# Altium PCB LogicsOnly.PcbDoc (part 1 of 3)
Units mm, origin at the board's own origin, x right, y up, seen from the top; angles counter-clockwise.
Board outline 98.85 x 158 mm, 2 copper layers (Top Layer, Bottom Layer); 236 components, 165 nets, 784 pads, 89 vias.
Unrouted connection lines stored in the file: 82.
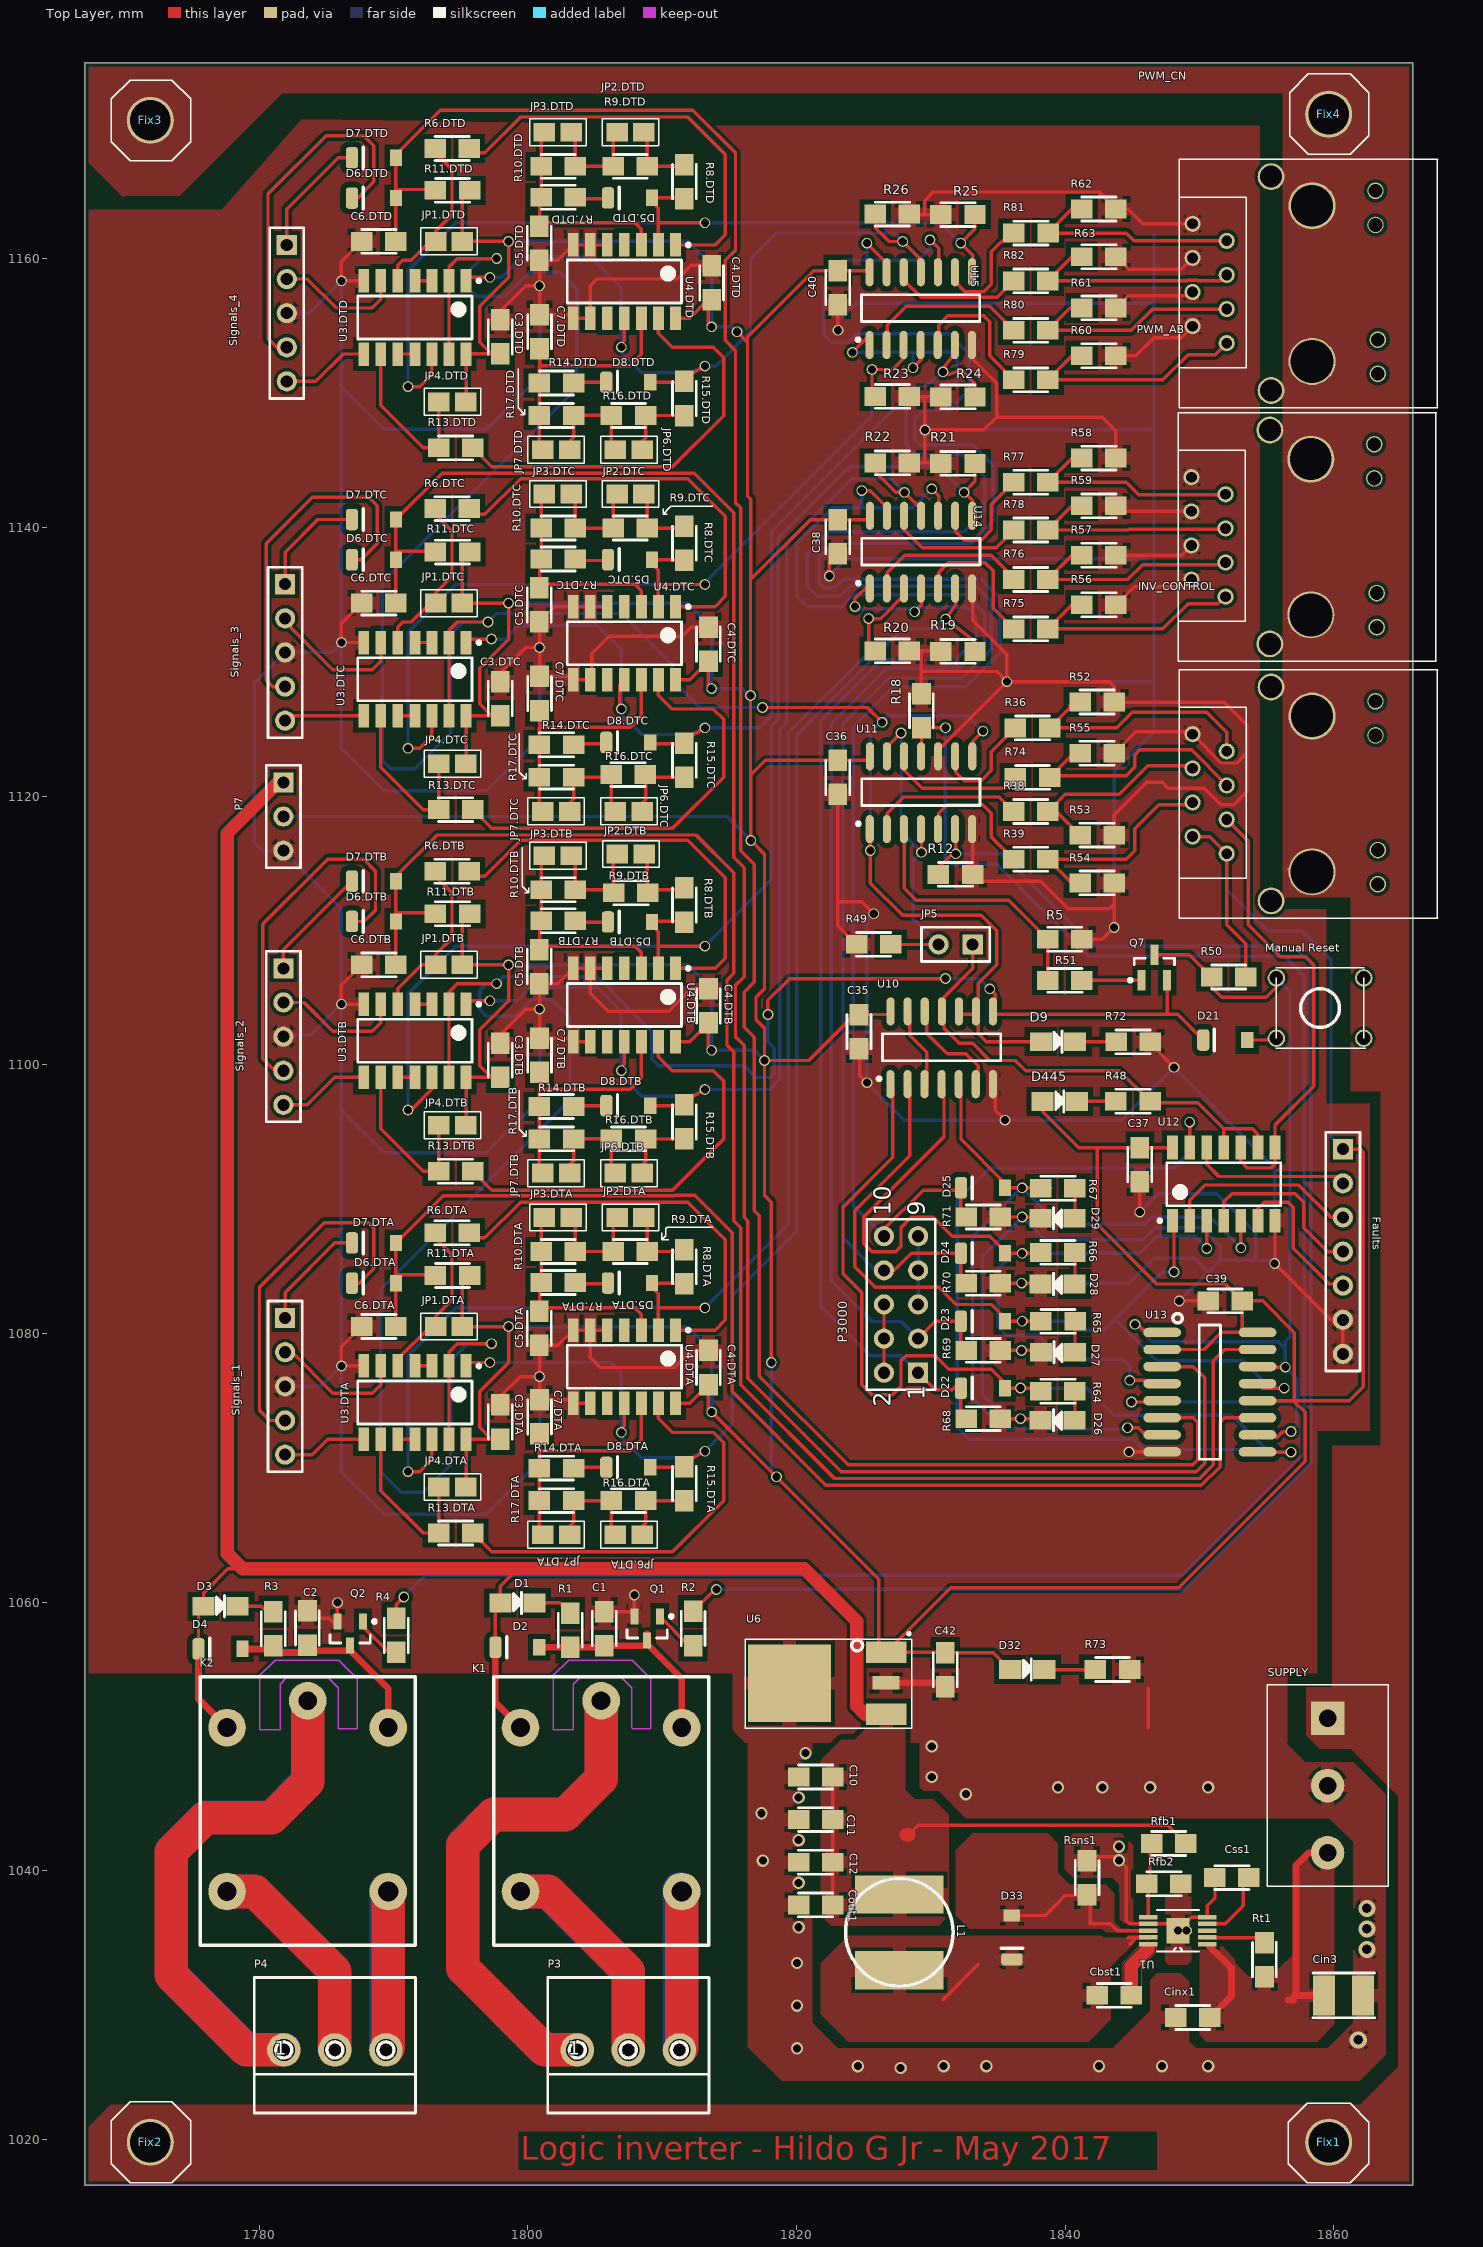
[diagram p0: Top Layer view]
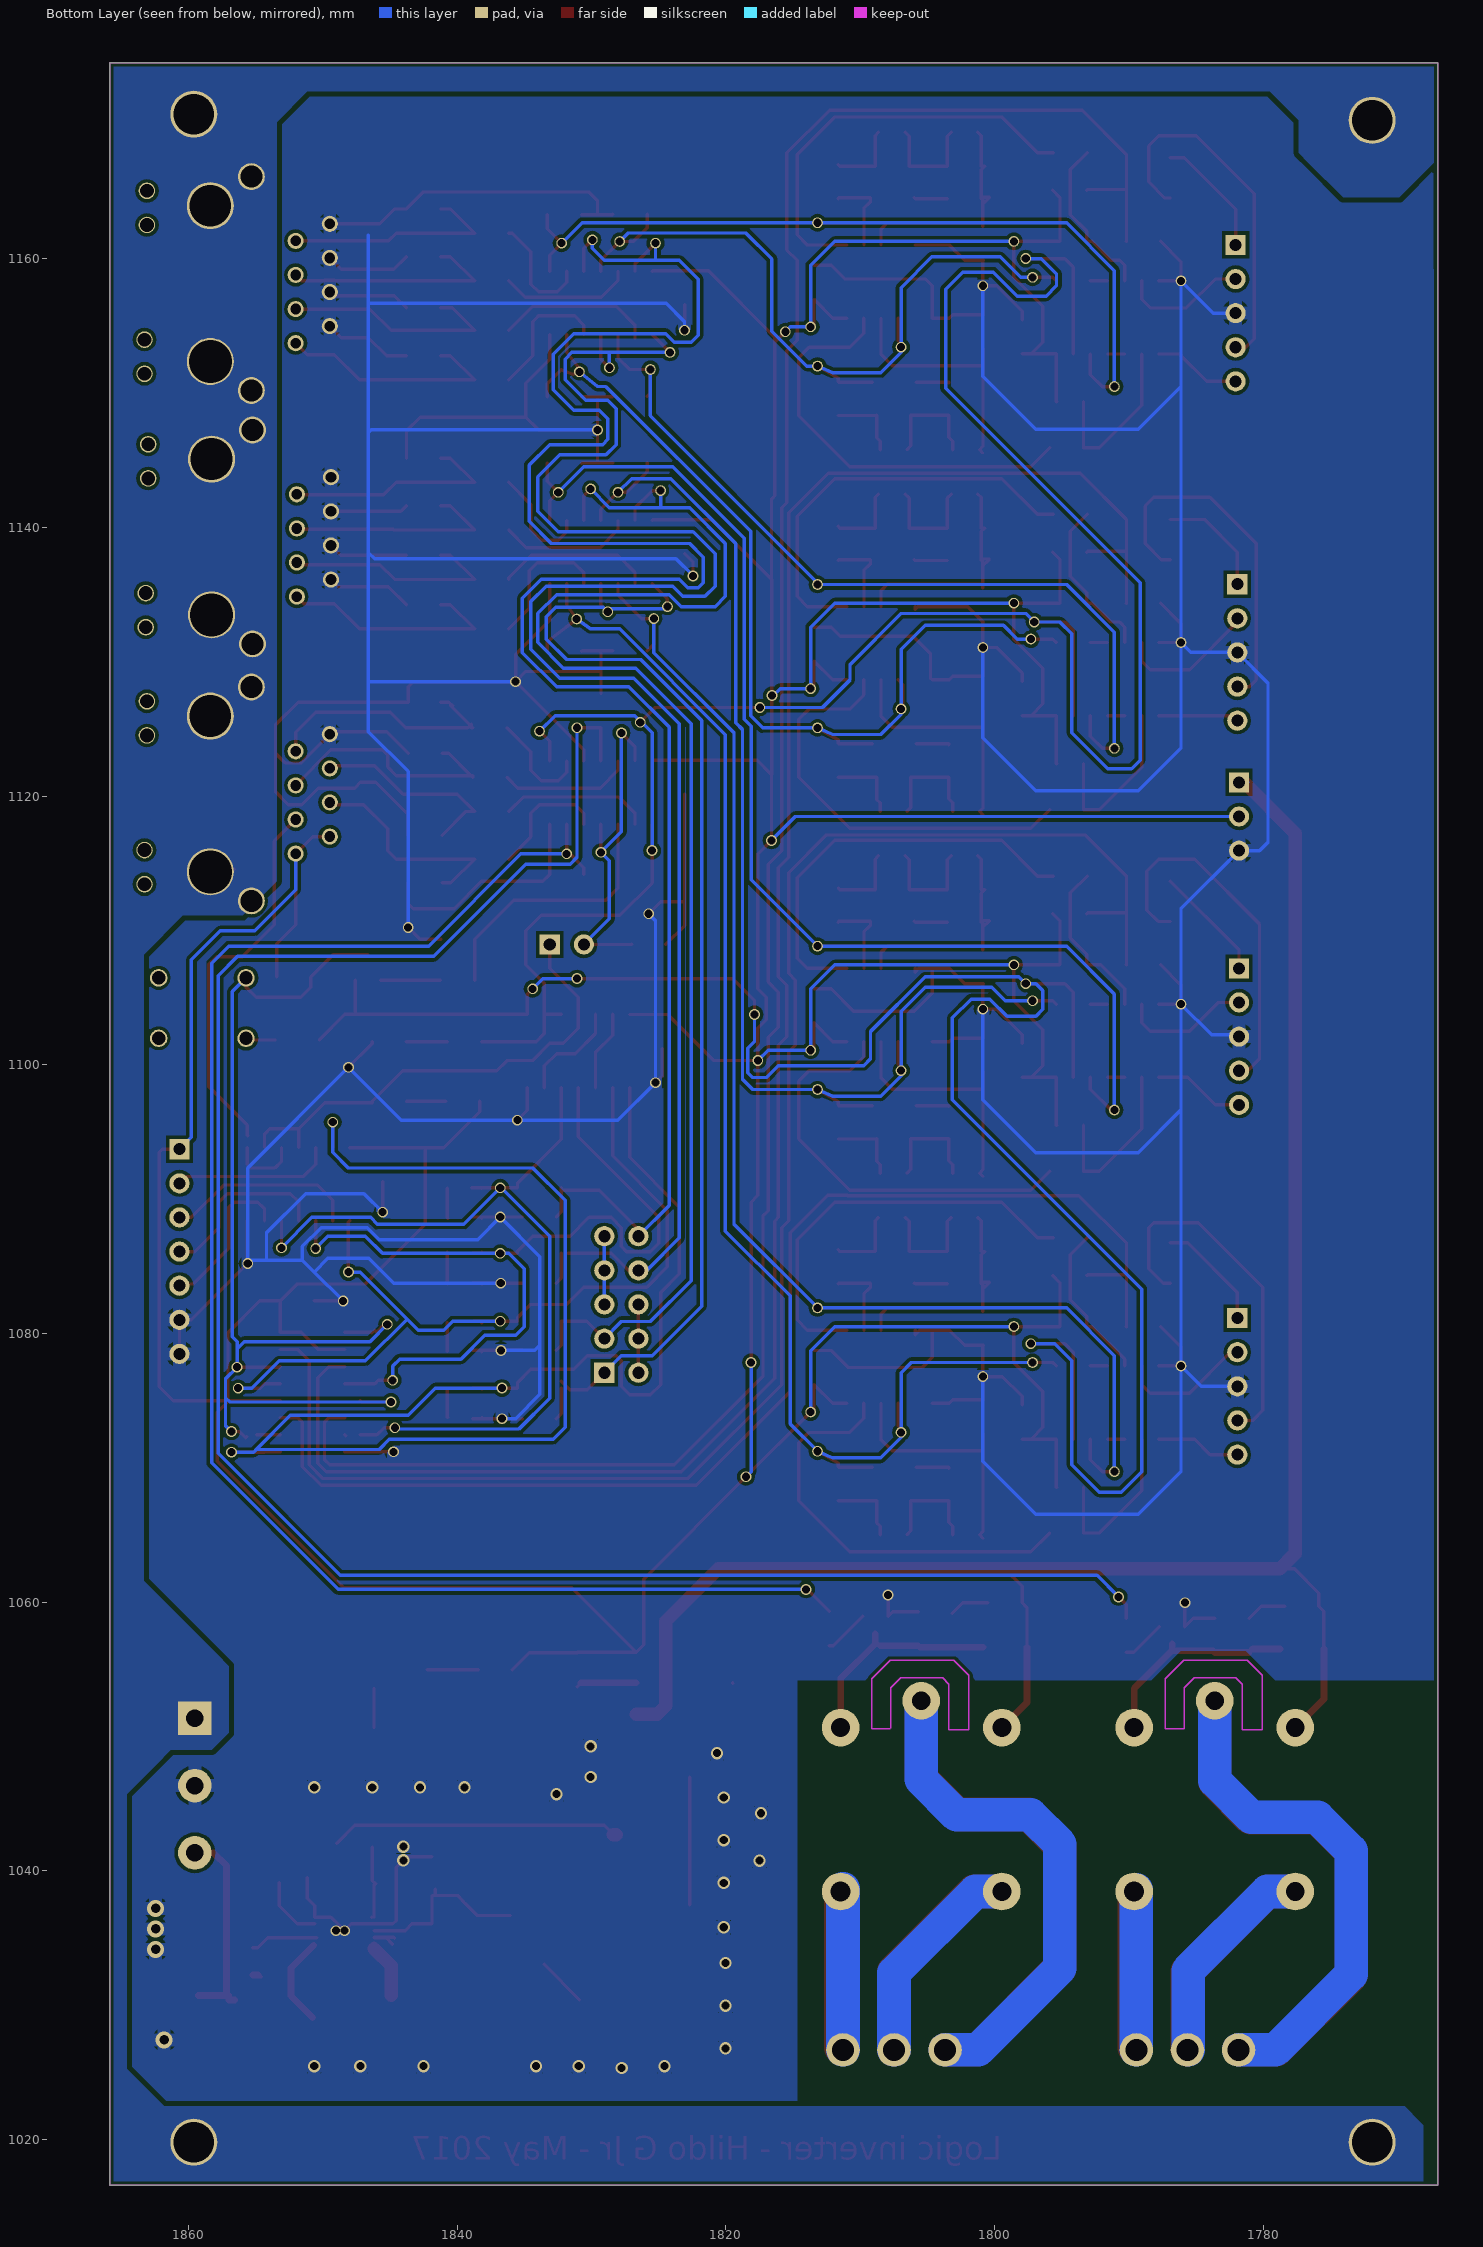
[diagram p1: Bottom Layer view, seen from below]

## Layer stack, top to bottom
Top Solder: solder mask 0.0102, Solder Resist, Dk 3.5
Top Layer: signal copper 0.0356
Dielectric 1: dielectric 0.32, FR-4, Dk 4.8
Bottom Layer: signal copper 0.0356
Bottom Solder: solder mask 0.0102, Solder Resist, Dk 3.5

## Board outline
1767.02,1174.6 1865.87,1174.6 1865.87,1016.6 1767.02,1016.6

## Design rules (kind name [scope] priority, off if disabled: settings)
Clearance Clearance_1 [All] p1: gap=0.15 except(0.25: Arc-Poly Track-Poly THPad-Poly Via-Poly Fill-Poly; 0.4: SMDPad-Poly Poly-Poly)
Clearance PowerClearance [InNet('NetD33_1') Or InNet('NetCbst1_1') Or InNet('NetCbst1_2') Or InNet('NetCbst1_1')Or InNet('NetC1_2') Or InNet('+8V') Or InNet('+5V') Or InNet('NetCin3_1') Or InNet('0')] p2: gap=0.15
Clearance "Stitching 0" [IsStitchingVia and InNet('0') vs (IsVia and (Not IsStitchingVia)) Or IsPad] p3: gap=0.127
Clearance [All] p4: gap=0.15 except(0.4: SMDPad-Poly)
PlaneClearance PlaneClearance_1 [All] p1: clearance=0.508
PlaneConnect [All] p1: planeconnectstyle=Direct reliefexpansion=0.508 reliefentries=4 reliefconductorwidth=0.254 reliefairgap=0.254
PolygonConnect Earth [InNet('EARTH')] p1: connectstyle=Direct reliefconductorwidth=0.254 reliefentries=4 polygonreliefangle="90 Angle" airgapwidth=0.254
PolygonConnect Power [InNet('NetD33_1') Or InNet('NetCbst1_1') Or InNet('NetCbst1_2') Or InNet('NetCbst1_1')Or InNet('NetC1_2') Or InNet('+8V') Or InNet('+5V') Or InNet('NetCin3_1') Or InNet('0')] p2: connectstyle=Relief reliefconductorwidth=1 reliefentries=4 polygonreliefangle="90 Angle" airgapwidth=0.254
PolygonConnect General [All] p3: connectstyle=Relief reliefconductorwidth=0.254 reliefentries=4 polygonreliefangle="90 Angle" airgapwidth=0.254
RoomDefinition PowerSupply [InComponentClass('PowerSupply')] p1: confinementstyle=ConfineIn formatcopy=TRUE lockcomponents=FALSE outline 1813.71,1022.69 1864.61,1022.69 1864.61,1058.98 1813.71,1058.98
RoomDefinition Lógica [InComponentClass('Lógica')] p2: confinementstyle=ConfineIn formatcopy=TRUE lockcomponents=FALSE outline 1821.29,1069.78 1869.05,1069.78 1869.05,1171.31 1821.29,1171.31
RoomDefinition LogicsOnly_Main [InComponentClass('LogicsOnly_Main')] p3: confinementstyle=ConfineIn formatcopy=TRUE lockcomponents=FALSE outline 1764.81,1013.13 1873.32,1013.13 1873.32,1179 1764.81,1179
RoomDefinition DTD [InComponentClass('DTD')] p4: confinementstyle=ConfineIn formatcopy=TRUE lockcomponents=FALSE outline 1785.33,1143.94 1815.63,1143.94 1815.63,1171.34 1785.33,1171.34
RoomDefinition DTC [InComponentClass('DTC')] p5: confinementstyle=ConfineIn formatcopy=TRUE lockcomponents=FALSE outline 1785.77,1117.56 1815.77,1117.56 1815.77,1144.61 1785.77,1144.61
RoomDefinition DTB [InComponentClass('DTB')] p6: confinementstyle=ConfineIn formatcopy=TRUE lockcomponents=FALSE outline 1779.68,1090.47 1816.293,1090.47 1816.293,1117.14 1779.68,1117.14
RoomDefinition DTA [InComponentClass('DTA')] p7: confinementstyle=ConfineIn formatcopy=TRUE lockcomponents=FALSE outline 1780.2,1062.65 1815.78,1062.65 1815.78,1090.76 1780.2,1090.76
RoomDefinition Auxiliar [InComponentClass('Auxiliar')] p8: confinementstyle=ConfineIn formatcopy=TRUE lockcomponents=FALSE outline 1770.88,1021.81 1817.08,1021.81 1817.08,1063.27 1770.88,1063.27
RoutingVias [All] p1: holewidth=0.711 width=1.27 viastyle="Through Hole" minholewidth=0.711 minwidth=1.27 maxholewidth=0.711 maxwidth=1.27
SolderMaskExpansion [All] p1: expansion=0.102
Width [All] p1: maxlimit=2.54 minlimit=0.254 preferedwidth=0.254 bottomlayer_maxwidth=2.5 minimp=50.000000 maximp=50.000000 favimp=50.000000
28 further rules are at their usual default settings.

## Classes and differential pairs
net class OK-PHT[1..4]: OK-PHT1 OK-PHT2 OK-PHT3 OK-PHT4
net class OK-PHB[1..4]: OK-PHB1 OK-PHB2 OK-PHB3 OK-PHB4
net class CMD_PHT[1..4]: CMD_PHT1 CMD_PHT2 CMD_PHT3 CMD_PHT4
net class CMD_PHB[1..4]: CMD_PHB1 CMD_PHB2 CMD_PHB3 CMD_PHB4
net class OK-PH[1..4]: OK-PH1 OK-PH2 OK-PH3 OK-PH4
net class EN-PH[1..4]: EN-PH2 EN-PH4
net class PHB[1..4]: PHB1 PHB2 PHB3 PHB4
net class PHT[1..4]: PHT1 PHT2 PHT3 PHT4
channel class DeadTimeDriver_Leg: DTA DTB DTC DTD
component class DTD: C3.DTD C4.DTD C5.DTD C6.DTD C7.DTD D5.DTD D6.DTD D7.DTD D8.DTD JP1.DTD JP2.DTD JP3.DTD JP4.DTD JP6.DTD JP7.DTD R6.DTD R7.DTD R8.DTD R9.DTD R10.DTD R11.DTD R13.DTD R14.DTD R15.DTD R16.DTD R17.DTD U3.DTD U4.DTD
component class DTC: C3.DTC C4.DTC C5.DTC C6.DTC C7.DTC D5.DTC D6.DTC D7.DTC D8.DTC JP1.DTC JP2.DTC JP3.DTC JP4.DTC JP6.DTC JP7.DTC R6.DTC R7.DTC R8.DTC R9.DTC R10.DTC R11.DTC R13.DTC R14.DTC R15.DTC R16.DTC R17.DTC U3.DTC U4.DTC
component class DTB: C3.DTB C4.DTB C5.DTB C6.DTB C7.DTB D5.DTB D6.DTB D7.DTB D8.DTB JP1.DTB JP2.DTB JP3.DTB JP4.DTB JP6.DTB JP7.DTB R6.DTB R7.DTB R8.DTB R9.DTB R10.DTB R11.DTB R13.DTB R14.DTB R15.DTB R16.DTB R17.DTB U3.DTB U4.DTB
component class DTA: C3.DTA C4.DTA C5.DTA C6.DTA C7.DTA D5.DTA D6.DTA D7.DTA D8.DTA JP1.DTA JP2.DTA JP3.DTA JP4.DTA JP6.DTA JP7.DTA R6.DTA R7.DTA R8.DTA R9.DTA R10.DTA R11.DTA R13.DTA R14.DTA R15.DTA R16.DTA R17.DTA U3.DTA U4.DTA
component class PowerSupply: *1 C10 C11 C12 C42 Cboot1 Cbst1 Cff1 Cin3 Cinx1 Cout1 Cout_1 Cout_2 Css1 D31 D32 D33 L1 R73 Rfb1 Rfb2 Rfbb1 Rfbt1 Rsns1 Rt1 U1 U6 U16
component class Auxiliar: C1 C2 D1 D2 D3 D4 K1 P3 P4 Q1 Q2 R1 R2 R3 R4
component class LogicsOnly_Main: Faults Fix1 Fix2 Fix3 Fix4 INV_CONTROL P7 Pino? PWM_AB PWM_CN Signals_1 Signals_2 Signals_3 Signals_4 SUPPLY
component class Lógica: C35 C36 C37 C38 C39 C40 D9 D21 D22 D23 D24 D25 D26 D27 D28 D29 D445 D? JP5 "Manual Reset" P3000 Q7 R5 R12 R18 R19 R20 R21 R22 R23 R24 R25 R26 R36 R38 R39 R48 R49 R50 R51 R52 R53 R54 R55 R56 R57 R58 R59 R60 R61 R62 R63 R64 R65 R66 R67 R68 R69 R70 R71 R72 R74 R75 R76 R77 R78 R79 R80 R81 R82 R? U10 U11 U12 U13 U14 U15

## Components (designator, comment, footprint, x,y, rotation, side; value= is the part's Value field where it differs from the comment)
C1 "" 0805_W 1805.699,1058.046 r270 top
C2 "" 0805_W 1783.6,1058.09 r270 top
C3.DTA "" 0805_W 1797.939,1073.411 r90 top (schematic designator C3)
C3.DTB "" 0805_W 1797.939,1100.335 r90 top (schematic designator C3)
C3.DTC "" 0805_W 1797.939,1127.259 r90 top (schematic designator C3)
C3.DTD "" 0805_W 1797.939,1154.183 r90 top (schematic designator C3)
C4.DTA "" 0805_W 1813.428,1077.465 r90 top (schematic designator C4)
C4.DTB "" 0805_W 1813.428,1104.389 r90 top (schematic designator C4)
C4.DTC "" 0805_W 1813.428,1131.313 r90 top (schematic designator C4)
C4.DTD "" 0805_W 1813.67,1158.2 r90 top (schematic designator C4)
C5.DTA "" 0805_W 1800.86,1080.396 r270 top (schematic designator C5)
C5.DTB "" 0805_W 1800.86,1107.32 r270 top (schematic designator C5)
C5.DTC "" 0805_W 1800.86,1134.244 r270 top (schematic designator C5)
C5.DTD "" 0805_W 1800.86,1161.168 r270 top (schematic designator C5)
C6.DTA "" 0805_W 1788.917,1080.513 r180 top (schematic designator C6)
C6.DTB "" 0805_W 1788.917,1107.437 r180 top (schematic designator C6)
C6.DTC "" 0805_W 1788.917,1134.361 r180 top (schematic designator C6)
C6.DTD "" 0805_W 1788.917,1161.285 r180 top (schematic designator C6)
C7.DTA "" 0805_W 1800.86,1073.792 r90 top (schematic designator C7)
C7.DTB "" 0805_W 1800.86,1100.716 r90 top (schematic designator C7)
C7.DTC "" 0805_W 1800.86,1127.64 r90 top (schematic designator C7)
C7.DTD "" 0805_W 1800.86,1154.564 r90 top (schematic designator C7)
C10 "" 0805_W 1821.425,1046.988 r180 top
C11 "" 0805_W 1821.425,1043.813 r180 top
C12 "" 0805_W 1821.425,1040.638 r180 top
C35 "" 0805_W 1824.654,1102.487 r270 top
C36 "" 0805_W 1823.076,1121.41 r270 top
C37 "" 0805_W 1845.555,1092.581 r270 top
C38 "" 0805_W 1823.076,1139.317 r270 top
C39 "" 0805_W 1851.905,1082.421 r180 top
C40 "" 0805_W 1823.076,1157.859 r270 top
C42 "" 0805_W 1831.077,1054.989 r270 top
Cbst1 "" 0805_W 1843.65,1030.732 r180 top
Cin3 "" 1210_W 1859.271,1030.732 r0 top
Cinx1 "" 0805_W 1849.492,1029.081 r180 top
Cout1 "" 0805_W 1821.425,1037.463 r180 top
Css1 "" 0805_W 1852.413,1039.495 r180 top
D1 "" LED_0805 1799.222,1059.951 r0 top
D2 "" SOD-123 1799.216,1056.649 r180 top
D3 "" LED_0805 1777.124,1059.697 r0 top
D4 "" SOD-123 1777.118,1056.529 r180 top
D5.DTA "" SOD-123 1807.598,1083.761 r180 top (schematic designator D5)
D5.DTB "" SOD-123 1807.598,1110.638 r180 top (schematic designator D5)
D5.DTC "" SOD-123 1807.598,1137.609 r180 top (schematic designator D5)
D5.DTD "" SOD-123 1807.598,1164.533 r180 top (schematic designator D5)
D6.DTA "" SOD-123 1788.541,1083.752 r180 top (schematic designator D6)
D6.DTB "" SOD-123 1788.541,1110.676 r180 top (schematic designator D6)
D6.DTC "" SOD-123 1788.541,1137.6 r180 top (schematic designator D6)
D6.DTD "" SOD-123 1788.541,1164.524 r180 top (schematic designator D6)
D7.DTA "" SOD-123 1788.541,1086.746 r180 top (schematic designator D7)
D7.DTB "" SOD-123 1788.541,1113.67 r180 top (schematic designator D7)
D7.DTC "" SOD-123 1788.541,1140.594 r180 top (schematic designator D7)
D7.DTD "" SOD-123 1788.541,1167.518 r180 top (schematic designator D7)
D8.DTA "" SOD-123 1807.471,1070.045 r180 top (schematic designator D8)
D8.DTB "" SOD-123 1807.471,1096.969 r180 top (schematic designator D8)
D8.DTC "" SOD-123 1807.47,1124 r180 top (schematic designator D8)
D8.DTD "" SOD-123 1807.471,1150.817 r180 top (schematic designator D8)
D9 "" LED_0805 1839.459,1101.725 r0 top
D21 "" SOD-123 1851.905,1101.852 r180 top
D22 "" SOD-123 1833.871,1075.941 r180 top
D23 "" SOD-123 1833.871,1080.919 r180 top
D24 "" SOD-123 1833.871,1085.977 r180 top
D25 "" SOD-123 1833.871,1090.851 r180 top
D26 "" LED_0805 1839.427,1073.556 r180 top
D27 "" LED_0805 1839.459,1078.611 r180 top
D28 "" LED_0805 1839.427,1083.688 r180 top
D29 "" LED_0805 1839.427,1088.59 r180 top
D32 "" LED_0805 1837.173,1054.989 r0 top
D33 "" SOD-123 1836.03,1035.05 r270 top
D445 "" LED_0805 1839.586,1097.28 r0 top
Faults "" HDR1X7 1860.668,1093.724 r270 top
Fix1 "" PINO 1859.604,1019.81 r0 top
Fix2 "" PINO 1771.895,1019.81 r90 top
Fix3 "" PINO 1771.895,1170.305 r90 top
Fix4 "" PINO 1859.604,1170.768 r90 top
INV_CONTROL "" RJ-45 1856.375,1120.165 r90 top
JP1.DTA "" JUMPER 1794.129,1080.523 r180 top (schematic designator JP1)
JP1.DTB "" JUMPER 1794.129,1107.447 r180 top (schematic designator JP1)
JP1.DTC "" JUMPER 1794.129,1134.371 r180 top (schematic designator JP1)
JP1.DTD "" JUMPER 1794.129,1161.295 r180 top (schematic designator JP1)
JP2.DTA "" JUMPER 1807.64,1088.641 r0 top (schematic designator JP2)
JP2.DTB "" JUMPER 1807.67,1115.7 r0 top (schematic designator JP2)
JP2.DTC "" JUMPER 1807.64,1142.489 r0 top (schematic designator JP2)
JP2.DTD "" JUMPER 1807.64,1169.413 r0 top (schematic designator JP2)
JP3.DTA "" JUMPER 1802.236,1088.641 r0 top (schematic designator JP3)
JP3.DTB "" JUMPER 1802.236,1115.565 r0 top (schematic designator JP3)
JP3.DTC "" JUMPER 1802.236,1142.489 r0 top (schematic designator JP3)
JP3.DTD "" JUMPER 1802.236,1169.413 r0 top (schematic designator JP3)
JP4.DTA "" JUMPER 1794.378,1068.575 r180 top (schematic designator JP4)
JP4.DTB "" JUMPER 1794.378,1095.499 r180 top (schematic designator JP4)
JP4.DTC "" JUMPER 1794.378,1122.423 r180 top (schematic designator JP4)
JP4.DTD "" JUMPER 1794.378,1149.347 r180 top (schematic designator JP4)
JP5 "" HDR1X2 1833.109,1108.964 r180 top
JP6.DTA "" JUMPER 1807.513,1065.019 r0 top (schematic designator JP6)
JP6.DTB "" JUMPER 1807.513,1091.943 r0 top (schematic designator JP6)
JP6.DTC "" JUMPER 1807.513,1118.867 r0 top (schematic designator JP6)
JP6.DTD "" JUMPER 1807.513,1145.791 r0 top (schematic designator JP6)
JP7.DTA "" JUMPER 1802.109,1065.019 r0 top (schematic designator JP7)
JP7.DTB "" JUMPER 1802.109,1091.943 r0 top (schematic designator JP7)
JP7.DTC "" JUMPER 1802.109,1118.867 r0 top (schematic designator JP7)
JP7.DTD "" JUMPER 1802.109,1145.791 r0 top (schematic designator JP7)
K1 "" "Relay - SPDT" 1811.454,1038.471 r90 top
K2 "" "Relay - SPDT" 1789.61,1038.471 r90 top
L1 "" "SRN8040T - Inductor" 1827.648,1035.431 r180 top
"Manual Reset" "" "Tactile SPST-NO" 1858.965,1104.229 r0 top
P3 "" KK-3_G 1807.479,1026.677 r180 top
P4 "" KK-3_G 1785.635,1026.677 r180 top
P7 "" HDR1X3 1781.801,1121.029 r270 top
P3000 "" HDR2X5 1829.045,1077.087 r90 top
PWM_AB "" RJ-45 1856.285,1139.294 r90 top
PWM_CN "" RJ-45 1856.375,1158.159 r90 top
Q1 "" SOT-23-TT3_L 1808.874,1058.046 r270 top
Q2 "" SOT-23-TT3_L 1786.776,1057.671 r270 top
Q7 "" SOT-23-TT3_N 1846.637,1107.247 r90 top
R1 "" 0805_W 1803.159,1057.919 r270 top
R2 "" 0805_W 1812.312,1058.053 r270 top
R3 "" 0805_W 1781.06,1058.04 r270 top
R4 "" 0805_W 1790.214,1057.545 r270 top
R5 "" 0805_W 1839.967,1109.345 r180 top
R6.DTA "" 0805_W 1794.37,1087.5 r180 top (schematic designator R6)
R6.DTB "" 0805_W 1794.37,1114.4 r180 top (schematic designator R6)
R6.DTC "" 0805_W 1794.37,1141.4 r180 top (schematic designator R6)
R6.DTD "" 0805_W 1794.37,1168.2 r180 top (schematic designator R6)
R7.DTA "" 0805_W 1802.264,1083.796 r180 top (schematic designator R7)
R7.DTB "" 0805_W 1802.264,1110.72 r180 top (schematic designator R7)
R7.DTC "" 0805_W 1802.264,1137.644 r180 top (schematic designator R7)
R7.DTD "" 0805_W 1802.264,1164.568 r180 top (schematic designator R7)
R8.DTA "" 0805_W 1811.637,1084.968 r90 top (schematic designator R8)
R8.DTB "" 0805_W 1811.637,1111.892 r90 top (schematic designator R8)
R8.DTC "" 0805_W 1811.637,1138.816 r90 top (schematic designator R8)
R8.DTD "" 0805_W 1811.637,1165.74 r90 top (schematic designator R8)
R9.DTA "" 0805_W 1807.625,1086.101 r180 top (schematic designator R9)
R9.DTB "" 0805_W 1807.67,1112.8 r180 top (schematic designator R9)
R9.DTC "" 0805_W 1807.625,1139.949 r180 top (schematic designator R9)
R9.DTD "" 0805_W 1807.625,1166.873 r180 top (schematic designator R9)
R10.DTA "" 0805_W 1802.264,1086.101 r180 top (schematic designator R10)
R10.DTB "" 0805_W 1802.264,1113.025 r180 top (schematic designator R10)
R10.DTC "" 0805_W 1802.264,1139.949 r180 top (schematic designator R10)
R10.DTD "" 0805_W 1802.264,1166.873 r180 top (schematic designator R10)
R11.DTA "" 0805_W 1794.383,1084.333 r0 top (schematic designator R11)
R11.DTB "" 0805_W 1794.383,1111.257 r0 top (schematic designator R11)
R11.DTC "" 0805_W 1794.383,1138.181 r0 top (schematic designator R11)
R11.DTD "" 0805_W 1794.383,1165.105 r0 top (schematic designator R11)
R12 "" 0805_W 1831.839,1114.171 r180 top
R13.DTA "" 0805_W 1794.632,1065.146 r180 top (schematic designator R13)
R13.DTB "" 0805_W 1794.632,1092.07 r180 top (schematic designator R13)
R13.DTC "" 0805_W 1794.632,1118.994 r180 top (schematic designator R13)
R13.DTD "" 0805_W 1794.632,1145.918 r180 top (schematic designator R13)
R14.DTA "" 0805_W 1802.137,1069.972 r180 top (schematic designator R14)
R14.DTB "" 0805_W 1802.137,1096.896 r180 top (schematic designator R14)
R14.DTC "" 0805_W 1802.137,1123.82 r180 top (schematic designator R14)
R14.DTD "" 0805_W 1802.137,1150.744 r180 top (schematic designator R14)
R15.DTA "" 0805_W 1811.655,1068.839 r270 top (schematic designator R15)
R15.DTB "" 0805_W 1811.655,1095.763 r270 top (schematic designator R15)
R15.DTC "" 0805_W 1811.655,1122.687 r270 top (schematic designator R15)
R15.DTD "" 0805_W 1811.655,1149.611 r270 top (schematic designator R15)
R16.DTA "" 0805_W 1807.498,1067.559 r180 top (schematic designator R16)
R16.DTB "" 0805_W 1807.498,1094.483 r180 top (schematic designator R16)
R16.DTC "" 0805_W 1807.47,1121.6 r180 top (schematic designator R16)
R16.DTD "" 0805_W 1807.498,1148.331 r180 top (schematic designator R16)
R17.DTA "" 0805_W 1802.137,1067.559 r180 top (schematic designator R17)
R17.DTB "" 0805_W 1802.137,1094.483 r180 top (schematic designator R17)
R17.DTC "" 0805_W 1802.137,1121.407 r180 top (schematic designator R17)
R17.DTD "" 0805_W 1802.137,1148.331 r180 top (schematic designator R17)
R18 "" 0805_W 1829.299,1126.363 r270 top
R19 "" 0805_W 1832.005,1130.789 r0 top
R20 "" 0805_W 1827.14,1130.808 r180 top
R21 "" 0805_W 1832.005,1144.778 r0 top
R22 "" 0805_W 1827.14,1144.797 r180 top
R23 "" 0805_W 1827.14,1149.75 r180 top
R24 "" 0805_W 1832.005,1149.731 r0 top
R25 "" 0805_W 1832.005,1163.301 r0 top
R26 "" 0805_W 1827.14,1163.32 r180 top
R36 "" 0805_W 1837.554,1125.093 r0 top
R38 "" 0805_W 1837.427,1118.87 r0 top
R39 "" 0805_W 1837.427,1115.314 r0 top
R48 "" 0805_W 1845.047,1097.28 r180 top
R49 "" 0805_W 1825.743,1108.964 r180 top
R50 "" 0805_W 1852.159,1106.551 r0 top
R51 "" 0805_W 1839.967,1106.297 r0 top
R52 "" 0805_W 1842.38,1126.998 r180 top
R53 "" 0805_W 1842.38,1117.092 r180 top
R54 "" 0805_W 1842.38,1113.536 r180 top
R55 "" 0805_W 1842.38,1123.188 r180 top
R56 "" 0805_W 1842.507,1134.237 r180 top
R57 "" 0805_W 1842.507,1137.92 r180 top
R58 "" 0805_W 1842.507,1145.159 r180 top
R59 "" 0805_W 1842.507,1141.603 r180 top
R60 "" 0805_W 1842.507,1152.779 r180 top
R61 "" 0805_W 1842.507,1156.335 r180 top
R62 "" 0805_W 1842.507,1163.701 r180 top
R63 "" 0805_W 1842.507,1160.145 r180 top
R64 "" 0805_W 1839.459,1075.693 r180 top
R65 "" 0805_W 1839.47,1080.9 r180 top
R66 "" 0805_W 1839.459,1086.031 r180 top
R67 "" 0805_W 1839.459,1090.803 r180 top
R68 "" 0805_W 1833.898,1073.658 r180 top
R69 "" 0805_W 1833.898,1078.738 r180 top
R70 "" 0805_W 1833.898,1083.742 r180 top
R71 "" 0805_W 1833.898,1088.67 r180 top
R72 "" 0805_W 1845.047,1101.725 r0 top
R73 "" 0805_W 1843.523,1054.989 r180 top
R74 "" 0805_W 1837.554,1121.41 r0 top
R75 "" 0805_W 1837.427,1132.459 r0 top
R76 "" 0805_W 1837.427,1136.142 r0 top
R77 "" 0805_W 1837.427,1143.381 r0 top
R78 "" 0805_W 1837.427,1139.825 r0 top
R79 "" 0805_W 1837.427,1151.001 r0 top
R80 "" 0805_W 1837.427,1154.684 r0 top
R81 "" 0805_W 1837.439,1161.923 r0 top
R82 "" 0805_W 1837.427,1158.367 r0 top
Rfb1 "" 0805_W 1847.714,1042.035 r180 top
Rfb2 "" 0805_W 1847.333,1039.056 r0 top
Rsns1 "" 0805_W 1841.618,1039.495 r90 top
Rt1 "" 0805_W 1854.817,1033.392 r90 top
Signals_1 "" HDR1X5 1781.928,1081.151 r270 top
Signals_2 "" HDR1X5 1781.801,1107.186 r270 top
Signals_3 "" HDR1X5 1781.928,1135.78 r270 top
Signals_4 "" HDR1X5 1782.055,1161.034 r270 top
SUPPLY "" "3 Pin  Borner" 1859.525,1046.353 r270 top
U1 "" 10MSOP 1848.387,1035.558 r180 top
U3.DTA "" SOIC-14N 1776.349,1063.966 r270 top (schematic designator U3)
U3.DTB "" SOIC-14N 1776.349,1090.89 r270 top (schematic designator U3)
U3.DTC "" SOIC-14N 1776.349,1117.814 r270 top (schematic designator U3)
U3.DTD "" SOIC-14N 1776.349,1144.738 r270 top (schematic designator U3)
U4.DTA "" SOIC-14N 1791.939,1066.633 r270 top (schematic designator U4)
U4.DTB "" SOIC-14N 1791.939,1093.557 r270 top (schematic designator U4)
U4.DTC "" SOIC-14N 1791.939,1120.481 r270 top (schematic designator U4)
U4.DTD "" SOIC-14N 1791.939,1147.405 r270 top (schematic designator U4)
U6 "" LM7805 1823.076,1053.973 r0 top
U10 "" SO14-Wide 1830.84,1101.28 r0 top
U11 "" SO14-Wide 1829.299,1120.267 r0 top
U12 "" SOIC-14N 1867.04,1102.026 r90 top
U13 "" SOIC16_Wide 1850.762,1075.641 r0 top
U14 "" SO14-Wide 1829.299,1138.174 r0 top
U15 "" SO14-Wide 1829.28,1156.3 r0 top

## Footprints (in the part's own frame and the unit in brackets; to place one, negate y for a bottom-side part, rotate by r counter-clockwise, add the part's x,y. Pads: shape width x height; smd on the part's side, far side on the other; paste and mask are expansions set on the pad)
"3 Pin  Borner" [mm]
  rect 2.5x2.5 hole 1.3 mask+0.05: 1(-5,0)
  round 2.5 hole 1.3 mask+0.05: 2(0,0) 3(5,0)
  silkscreen extent -7.5,-4.5 7.5,4.5
10MSOP [mil]
  rect 54x13 smd: 1(-86.5,39.4) 2(-86.5,19.7) 3(-86.5,0) 4(-86.5,-19.7) 5(-86.5,-39.4) 6(86.5,-39.4) 7(86.5,-19.7) 8(86.5,0) 9(86.5,19.7) 10(86.5,39.4)
  rect 68x75 smd: 5(0,0)
  silkscreen extent -61,-61 61,61
0805_W [mm]
  rect 1.6x1.397 smd: 1(-1.263,-0.009) 2(1.277,-0.009)
  silkscreen extent -1.26,-0.9 1.28,0.88
1210_W [mm]
  rect 1.65x3 smd: 1(0,0) 2(2.9,0)
  silkscreen extent -0.83,-1.66 3.74,1.68
HDR1X2 [mm]
  rect 1.5x1.5 hole 0.9: 1(0,0)
  round 1.5 hole 0.9: 2(2.54,0)
  silkscreen extent -1.27,-1.27 3.81,1.27
HDR1X3 [mm] "Connector; Header; 3 Position"
  rect 1.5x1.5 hole 0.9: 1(0,0)
  round 1.5 hole 0.9: 2(2.54,0) 3(5.08,0)
  silkscreen extent -1.27,-1.27 6.35,1.27
HDR1X5 [mm] "Connector; Header; 5 Position"
  rect 1.5x1.5 hole 0.9: 1(0,0)
  round 1.5 hole 0.9: 2(2.54,0) 3(5.08,0) 4(7.62,0) 5(10.16,0)
  silkscreen extent -1.27,-1.27 11.43,1.27
HDR1X7 [mm] "Connector; Header; 7 Position"
  rect 1.5x1.5 hole 0.9: 1(0,0)
  round 1.5 hole 0.9: 2(2.54,0) 3(5.08,0) 4(7.62,0) 5(10.16,0) 6(12.7,0) 7(15.24,0)
  silkscreen extent -1.27,-1.27 16.51,1.27
HDR2X5 [mm] "Connector; Header; 5x2 Position"
  rect 1.5x1.5 hole 0.9: 1(0,0)
  round 1.5 hole 0.9: 2(0,2.54) 3(2.54,0) 4(2.54,2.54) 5(5.08,0) 6(5.08,2.54) 7(7.62,0) 8(7.62,2.54) 9(10.16,0) 10(10.16,2.54)
  silkscreen extent -1.27,-1.27 11.43,3.81
JUMPER [mm]
  rect 1.6x1.397 smd: 1(-1,0) 2(1,0)
  silkscreen extent -2.1,-1 2.1,1
KK-3_G [mm]
  round 2.5 hole 1.65: 1(3.8,0) 2(0,0) 3(-3.8,0)
  silkscreen extent -6,-5.4 6,4.7, body extent -6,-5.4 6,4.7, height 14
LED_0805 [mil]
  rect 65x55 smd: 1(-50,0) 2(50,0)
  silkscreen extent -12,-31 12,31
LM7805 [mm]
  rect 6.2x5.8 smd: 1(-3.6,0)
  rect 2x1 smd: 1(3.585,0.027)
  rect 3x1.6 smd: 2(3.6,2.3) 3(3.6,-2.3)
  silkscreen extent -6.88,-3.36 5.5,3.77
PINO [mm]
  round 3.5 hole 3 mask+0.05: 0(0,0)
  silkscreen extent -3,-3 3,2.9
"Relay - SPDT" [mm]
  round 2.8 hole 1.4: 1(14.2,6) 2(0,12) 4(12.2,12) 5(12.2,0)
  round 2.8 hole 1.5: 3(0,0)
  silkscreen extent -4,-2 16,14
RJ-45 [mm] "Connector"
  round 1.2 hole 0.8: 1(-4.44,4.355) 2(-3.17,6.895) 3(-1.9,4.355) 4(-0.63,6.895) 5(0.64,4.355) 6(1.91,6.895) 7(3.18,4.355) 8(4.45,6.895)
  round 2 hole 1.63: 9(-7.96,1.055) 9(7.96,1.055)
  round 3.5 hole 3.2: 9(-5.8,-1.995)
  round 3.5 hole 3.1: 9(5.8,-1.995)
  round 1.23 hole 1.02 mask+0.05: a1(-4.175,-6.895) a2(4.36,-6.715) k1(-6.715,-6.895) k2(6.9,-6.715)
  silkscreen extent -9.26,-11.35 9.26,7.89
SO14-Wide [mm]
  oval 0.6x2.1 smd: 1(-3.851,-2.716) 2(-2.581,-2.716) 3(-1.311,-2.716) 4(-0.041,-2.716) 5(1.229,-2.716) 6(2.499,-2.716) 7(3.769,-2.716) 8(3.78,2.7) 9(2.51,2.7) 10(1.24,2.7) 11(-0.03,2.7) 12(-1.3,2.7) 13(-2.57,2.7) 14(-3.84,2.7)
  silkscreen extent -4.83,-2.44 4.36,1.03, body extent -4.37,-1.92 4.28,1.98, height 1.75
SOD-123 [mm] "Diodo"
  rect 0.91x1.22 smd: 1(-1.635,0)
  rrect50% 0.91x1.6 smd: 2(1.635,0)
  silkscreen extent 0.8,-0.8 0.8,0.8
SOIC16_Wide [mm] "SOIC, 16-Leads, Body 9.9x3.9mm, Pitch 1.27mm, IPC Low Density"
  oval 2.8x0.7 smd: 1(-3.55,4.445) 2(-3.55,3.175) 3(-3.55,1.905) 4(-3.55,0.635) 5(-3.55,-0.635) 6(-3.55,-1.905) 7(-3.55,-3.175) 8(-3.55,-4.445) 9(3.55,-4.445) 10(3.55,-3.175) 11(3.55,-1.905) 12(3.55,-0.635) 13(3.55,0.635) 14(3.55,1.905) 15(3.55,3.175) 16(3.55,4.445)
  silkscreen extent -2.75,-5 0.8,5.85, body extent -2,-5 2,5, height 1.91
SOIC-14N [mm] "SOIC, 14-Leads, Body 8,61x3,90mm, Pitch 1,27mm, IPC Medium Density"
  rect 1.75x0.8 smd: 1(-13.625,19.05) 2(-13.625,17.78) 3(-13.625,16.51) 4(-13.625,15.24) 5(-13.625,13.97) 6(-13.625,12.7) 7(-13.625,11.43) 8(-8.175,11.43) 9(-8.175,12.7) 10(-8.175,13.97) 11(-8.175,15.24) 12(-8.175,16.51) 13(-8.175,17.78) 14(-8.175,19.05)
  silkscreen extent -13.75,10.99 -9.3,20.13, body extent -12.9,10.99 -8.9,19.49, height 1.75
SOT-23-TT3_L [mm] "SOT23, 3-Leads, Body 2.9x1.3mm, Pitch 0.95mm, Lead Span 2.4mm, IPC High Density"
  rect 1.2x0.6 smd: 1(-0.9,0.95) 2(-0.9,-0.95) 3(0.9,0)
  silkscreen extent -1.02,-1.5 0.7,1.93, body extent -0.7,-1.5 0.7,1.5, height 1.12
SOT-23-TT3_N [mm] "SOT23, 3-Leads, Body 2.9x1.3mm, Pitch 0.95mm, Lead Span 2.4mm, IPC Medium Density"
  rect 1.5x0.6 smd: 1(-0.95,0.95) 2(-0.95,-0.95) 3(0.95,0)
  silkscreen extent -1.07,-1.5 0.7,1.92, body extent -0.7,-1.5 0.7,1.5, height 1.12
"SRN8040T - Inductor" [mm]
  rect 6.6x2.85 smd mask+0.05: 1(0,2.825) 2(0,-2.825)
  silkscreen extent -4,-4 4,4
"Tactile SPST-NO" [mm] "switch"
  round 1.3 hole 1: 1(-3.25,2.25) 1(3.25,2.25) 2(-3.25,-2.25) 2(3.25,-2.25)
  silkscreen extent -3.3,-3 3.4,3

## Part data
C1 C2: library part Cap, "Capacitor"
C3.DTA C3.DTB C3.DTC C3.DTD C4.DTA C4.DTB C4.DTC C4.DTD C35 C36 C37 C38 C39 C40 C42: library part Capacitor_nao_polarizado, "Capacitor nao polarizado"
C5.DTA C5.DTB C5.DTC C5.DTD C6.DTA C6.DTB C6.DTC C6.DTD C7.DTA C7.DTB C7.DTC C7.DTD: library part Cap_0805, "Capacitor"
C10 C11 C12: library part GRM21BR61C106KE15L, "GRM21BR61C106KE1"
Cbst1 Css1: library part CC0805KRX7R8BB104, "CC0805KRX7R8BB10"
Cin3: library part C3225X7S2A335K200AB, "C3225X7S2A335K20"
Cinx1: library part C1608X5R1H105K080AB, "C1608X5R1H105K08"
Cout1: library part C0805C106K8PACTU, "C0805C106K8PACTU"
D1 D3 D9 D26 D27 D28 D29 D32 D445: library part LED0, "Typical INFRARED GaAs LED"
D2 D4: library part "Diode 1N4148", "High Conductance Fast Diode"
D5.DTA D5.DTB D5.DTC D5.DTD D6.DTA D6.DTB D6.DTC D6.DTD D7.DTA D7.DTB D7.DTC D7.DTD D8.DTA D8.DTB D8.DTC D8.DTD D21 D22 D23 D24 D25: library part "D Schottky", "Schottky Diode"
D33: library part B360A-13-F, "B360A-13-F"
Faults: library part "Header 7", "Header, 7-Pin"
Fix1 Fix2 Fix3 Fix4: library part Pino
INV_CONTROL PWM_AB PWM_CN: library part RJ-45
JP1.DTA JP1.DTB JP1.DTC JP1.DTD JP2.DTA JP2.DTB JP2.DTC JP2.DTD JP3.DTA JP3.DTB JP3.DTC JP3.DTD JP4.DTA JP4.DTB JP4.DTC JP4.DTD JP5 JP6.DTA JP6.DTB JP6.DTC JP6.DTD JP7.DTA JP7.DTB JP7.DTC JP7.DTD: library part "Header 2", "Header, 2-Pin"
K1 K2: library part Relay, "SPDT Relay"
L1: library part SRN8040-8R2Y, "SRN8040-8R2Y"
"Manual Reset": library part SW-PB, "Switch"
P3 P4 P7 SUPPLY: library part "Header 3", "Header, 3-Pin"
P3000: library part "Header 5X2", "Header, 5-Pin, Dual row"
Q1 Q2 Q7: library part BC847, "NPN General-purpose Transistor"
R1 R3 R5 R6.DTA R6.DTB R6.DTC R6.DTD R7.DTA R7.DTB R7.DTC R7.DTD R8.DTA R8.DTB R8.DTC R8.DTD R9.DTA R9.DTB R9.DTC R9.DTD R10.DTA R10.DTB R10.DTC R10.DTD R11.DTA R11.DTB R11.DTC R11.DTD R12 R13.DTA R13.DTB R13.DTC R13.DTD R14.DTA R14.DTB R14.DTC R14.DTD R15.DTA R15.DTB R15.DTC R15.DTD R16.DTA R16.DTB R16.DTC R16.DTD R17.DTA R17.DTB R17.DTC R17.DTD R18 R19 R20 R21 R22 R23 R24 R25 R26 R36 R38 R39 R48 R49 R50 R51 R52 R53 R54 R55 R56 R57 R58 R59 R60 R61 R62 R63 R64 R65 R66 R67 R68 R69 R70 R71 R72 R73 R74 R75 R76 R77 R78 R79 R80 R81 R82: library part Res_0805, "Resistor"
R2 R4: library part Res1, "Resistor"
Rfb1: library part CRCW040221K5FKED, "CRCW040221K5FKED"
Rfb2: library part CRCW040210K0FKED, "CRCW040210K0FKED"
Rsns1: library part CRM0805-FW-R050ELF, "CRM0805-FW-R050E"
Rt1: library part CRCW0402174KFKED, "CRCW0402174KFKED"
Signals_1 Signals_2 Signals_3 Signals_4: library part "Header 5", "Header, 5-Pin"
U1: library part LM25011MYX/NOPB, "LM25011MYX/NOPB"
U3.DTA U3.DTB U3.DTC U3.DTD: library part MC74HC08AD, "Quad 2-Input AND Gate"
U4.DTA U4.DTB U4.DTC U4.DTD: library part "Double 2-input NOR", "SN74AUP2G02DCUR"
U6: library part LM7805, "LM7805"
U10: library part HD74HC32FP, "Quad 2-Input OR Gates"
U11 U14 U15: library part M74HC125M1R, "Quad Bus Buffer (3-State)"
U12: library part HD74LV06AFP, "Hex Inverter Buffers / Drivers with Open Drain Outputs"
U13: library part SN74LS279AD, "Quadruple S-R Latches"

## Free pads (board coordinates)
  round 0.8 hole 0.6 mask+0.1: 2(1800.87,1104.145) 2(1800.87,1131.069) 2(1800.87,1157.993) 2(1800.87,1076.8) 4(1786.123,1077.592) 4(1786.123,1104.516) 4(1786.123,1131.44) 4(1786.123,1158.364) 6(1806.956,1072.649) 6(1806.956,1099.573) 6(1806.956,1126.497) 6(1806.956,1153.421) 7(1813.174,1071.242) 7(1813.174,1098.166) 7(1813.174,1125.09) 7(1813.174,1152.014) 8(1791.076,1069.718) 8(1791.076,1096.642) 8(1791.076,1123.566) 8(1791.076,1150.49) 9(1813.174,1081.91) 9(1813.174,1108.834) 9(1813.174,1135.758) 9(1813.174,1162.682) 10(1797.168,1077.849) 10(1797.168,1104.773) 10(1797.168,1158.621) 10(1797.295,1131.697) 11(1798.559,1080.523) 11(1798.559,1107.447) 11(1798.559,1134.371) 11(1798.559,1161.295) 12(1813.682,1074.163) 12(1813.682,1101.087) 12(1813.682,1128.011) 12(1813.682,1154.935) 13(1828.029,1142.619) 14(1832.474,1142.619) 15(1831.1,1133.19) 17(1825.362,1133.221) 18(1827.902,1161.288) 19(1832.22,1161.161) 20(1830.9,1151.59) 21(1825.616,1151.763) 22(1824.346,1134.11) 23(1828.791,1133.729) 24(1824.854,1142.746) 25(1830.061,1142.873) 26(1829.934,1161.415) 27(1825.235,1161.161) 28(1824.156,1153.033) 29(1828.664,1151.89) 30(1833.871,1124.839)

## Via types
v1: diameter 0.8, hole 0.6, Top Layer to Bottom Layer, 59 vias
v2: diameter 0.914/0.914 (per signal layer), hole 0.6, Top Layer to Bottom Layer, 26 vias
v3: diameter 1.27, hole 0.711, Top Layer to Bottom Layer, 4 vias